# Altium PCB JUNORPCFront.PcbDoc (part 2 of 2)
Units mm, origin at the board's own origin, x right, y up, seen from the top; angles counter-clockwise.
Board outline 105.76 x 80.76 mm, 8 copper layers (Top Layer, Internal Plane 1, Signal Layer 1, Internal Plane 2, Signal Layer 2, Internal Plane 3, Internal Plane 4, Bottom Layer), stack 1.684 mm thick; 360 components, 183 nets, 1164 pads, 385 vias.
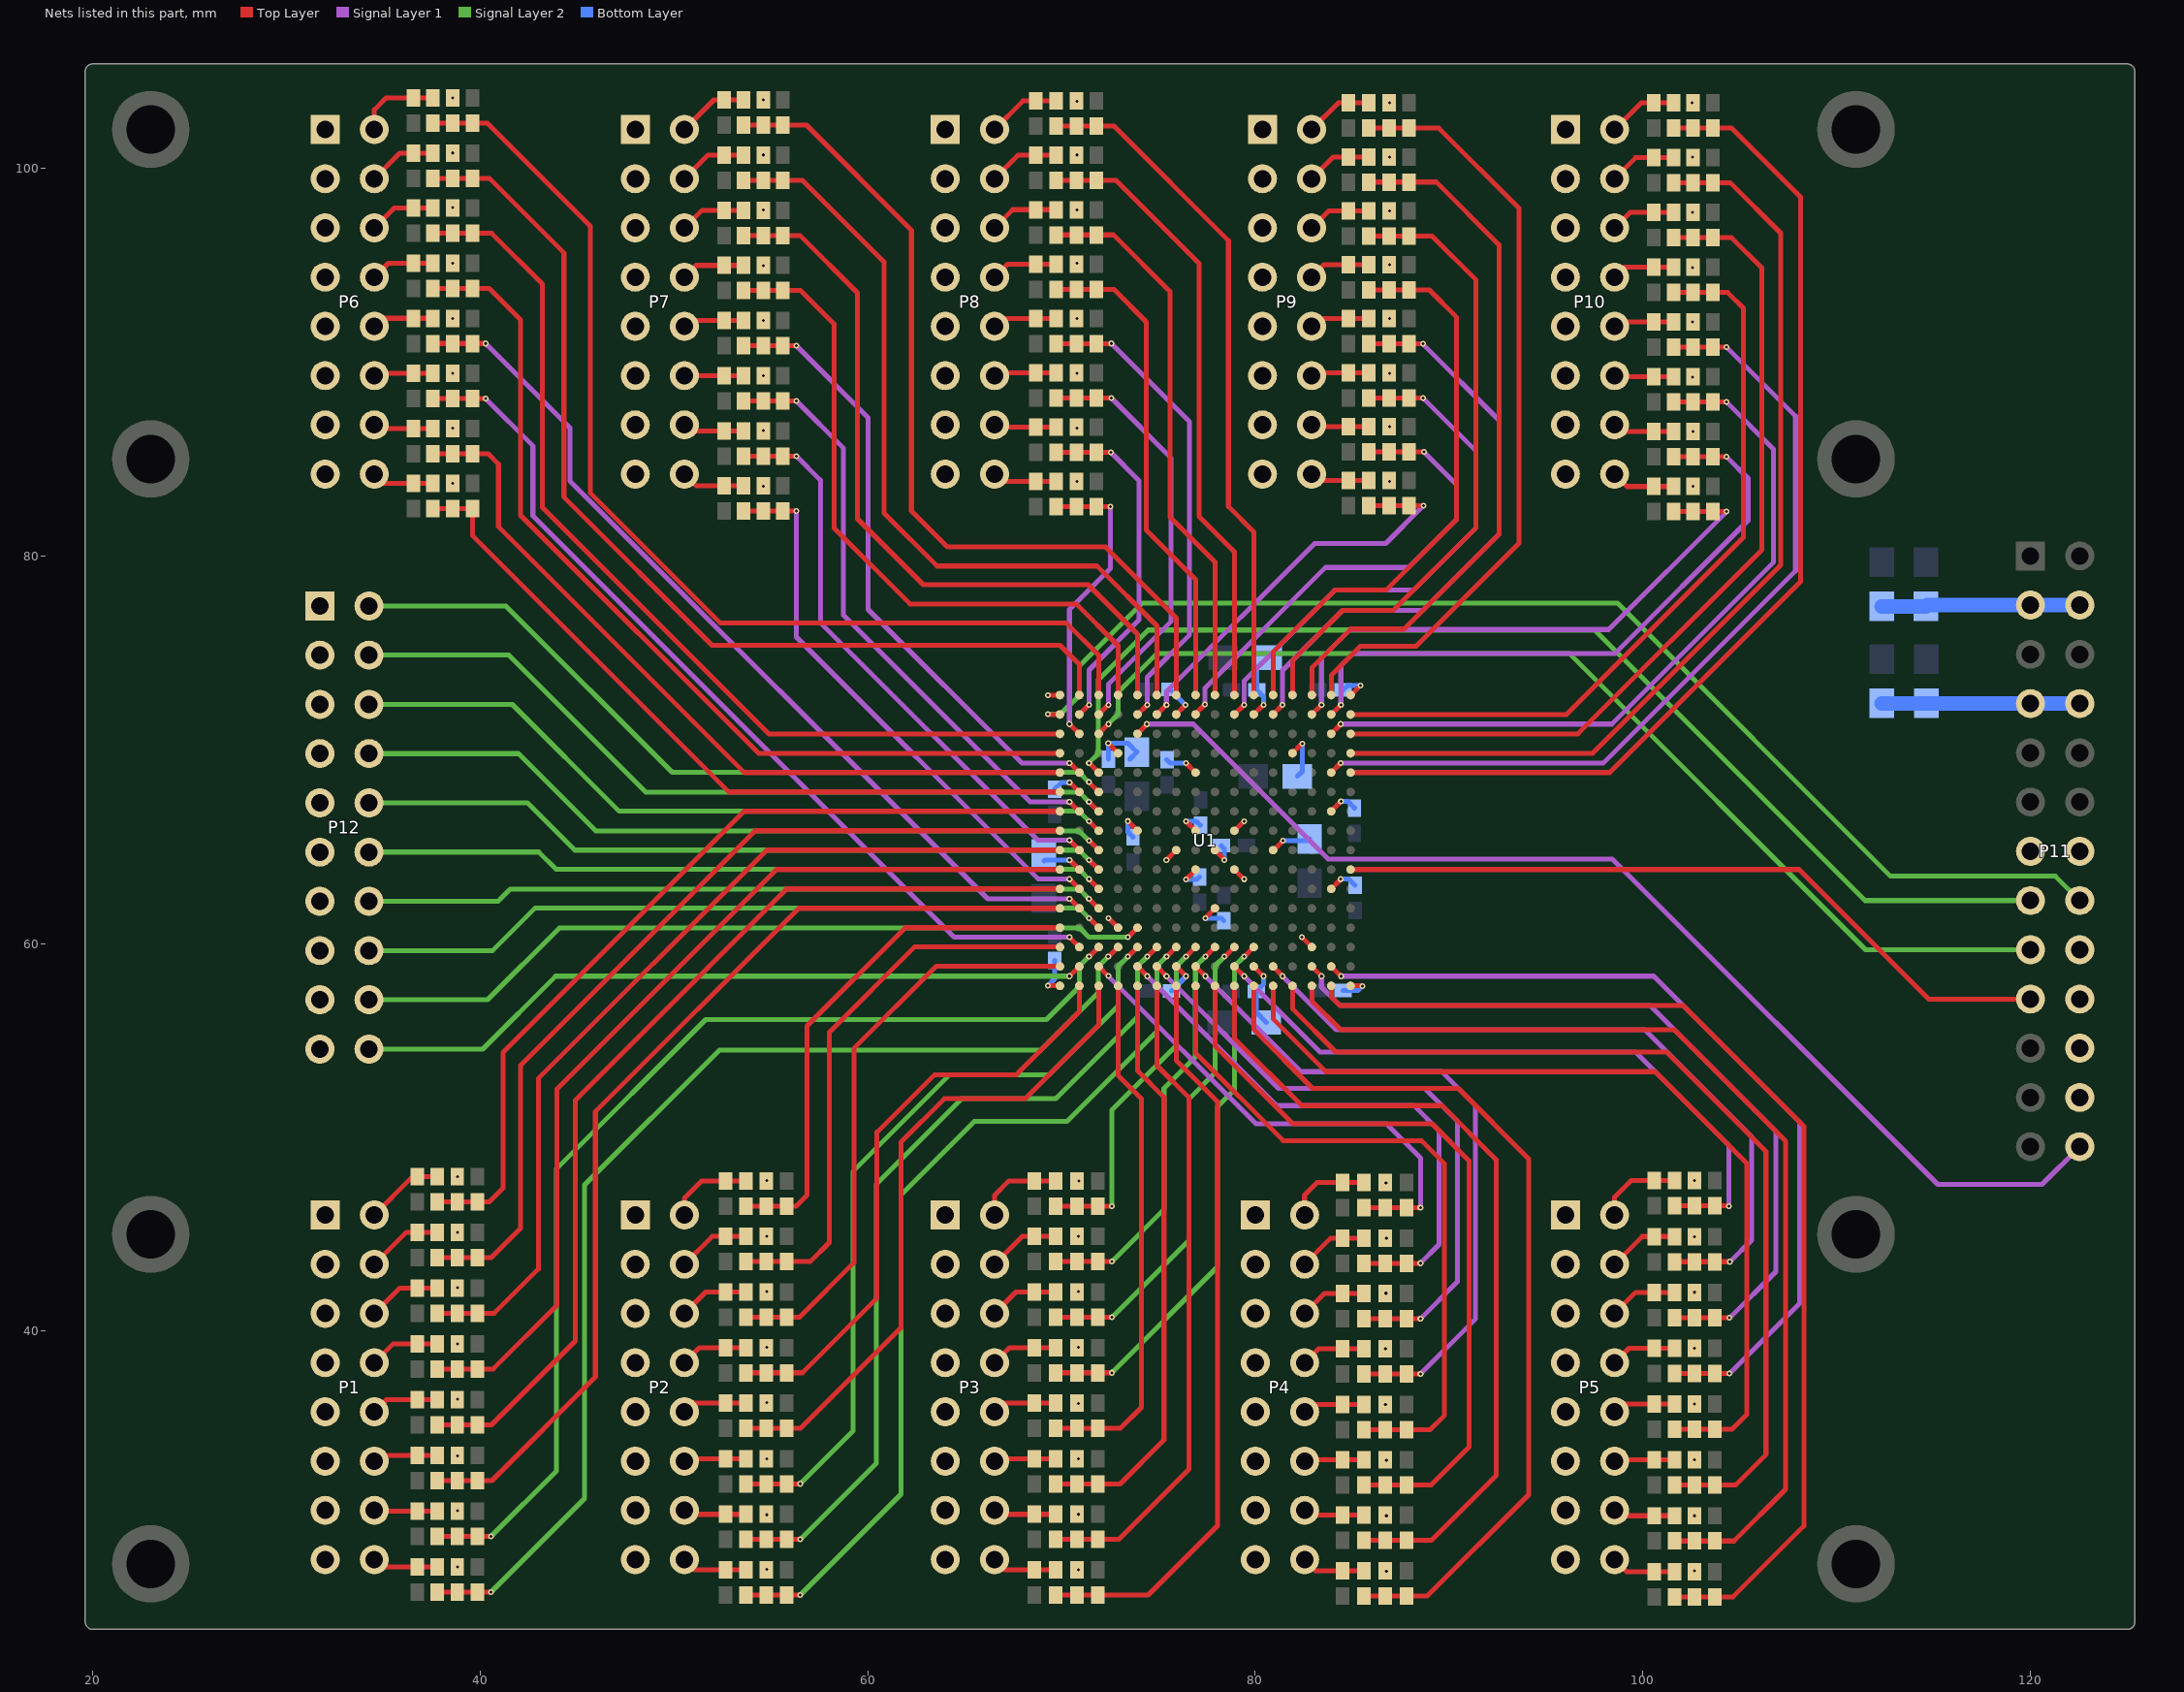
[diagram p8: the nets of this part, all layers, seen from the top]

## Via types
v1: diameter 0.305, hole 0.152, Top Layer to Bottom Layer, 385 vias

## Nets (pads, with @x,y where several pads share a name; then routed paths per layer and width w, separated by ;. In a path a pad name is that pad's centre, name@x,y a point inside that pad or via, vN(x,y) a via of type N, cw(c..) or ccw(c..) an arc to the next point about the centre after c; other vN are vias at no path point) (continued)
GND: C81.1 C82.1 C83.1 C84.1 C85.1 C86.1 C87.1 C88.1 C89.1 C90.1 C91.1 C92.1 C93.1 C94.1 C95.1 C96.1 C97.1 C98.1 C99.1 C100.1 C101.1 C102.1 C103.1 C104.1 C105.1 C112.1 C113.1 P1.1 P1.3 P1.5 P1.7 P1.9 P1.11 P1.13 P1.15 P2.1 P2.3 P2.5 P2.7 P2.9 P2.11 P2.13 P2.15 P3.1 P3.3 P3.5 P3.7 P3.9 P3.11 P3.13 P3.15 P4.1 P4.3 P4.5 P4.7 P4.9 P4.11 P4.13 P4.15 P5.1 P5.3 P5.5 P5.7 P5.9 P5.11 P5.13 P5.15 P6.1 P6.3 P6.5 P6.7 P6.9 P6.11 P6.13 P6.15 P7.1 P7.3 P7.5 P7.7 P7.9 P7.11 P7.13 P7.15 P8.1 P8.3 P8.5 P8.7 P8.9 P8.11 P8.13 P8.15 P9.1 P9.3 P9.5 P9.7 P9.9 P9.11 P9.13 P9.15 P10.1 P10.3 P10.5 P10.7 P10.9 P10.11 P10.13 P10.15 P11.3 P11.4 P11.7 P11.8 P11.13 P11.14 P11.18 P11.20 P11.22 P11.24 P12.1 P12.3 P12.5 P12.7 P12.9 P12.11 P12.13 P12.15 P12.17 P12.19 R4.1 R6.1 R10.1 R12.1 R16.1 R18.1 R22.1 R24.1 R28.1 R30.1 R34.1 R36.1 R40.1 R42.1 R46.1 R48.1 R52.1 R54.1 R58.1 R60.1 R64.1 R66.1 R70.1 R72.1 R76.1 R78.1 R82.1 R84.1 R88.1 R90.1 R94.1 R96.1 R100.1 R102.1 R106.1 R108.1 R112.1 R114.1 R118.1 R120.1 R124.1 R126.1 R130.1 R132.1 R136.1 R138.1 R142.1 R144.1 R148.1 R150.1 R154.1 R156.1 R160.1 R162.1 R166.1 R168.1 R172.1 R174.1 R178.1 R180.1 R184.1 R186.1 R190.1 R192.1 R196.1 R198.1 R202.1 R204.1 R208.1 R210.1 R214.1 R216.1 R220.1 R222.1 R226.1 R228.1 R232.1 R234.1 R238.1 R240.1 U1.A1 U1.A16 U1.B7 U1.B11 U1.D4 U1.D13 U1.E9 U1.G2 U1.G8 U1.G15 U1.H7 U1.H9 U1.H12 U1.J5 U1.J8 U1.K7 U1.K9 U1.L2 U1.L15 U1.M8 U1.N13 U1.P3 U1.R6 U1.R10 U1.T1 U1.T16 | length 65.5
  Top Layer w0.254: v1(69.291,57.821) U1.A1@69.918,57.821 ; v1(69.291,72.822) v1(69.291,72.822) U1.A16@69.918,72.821 ; v1(70.409,64.313) 70.426,64.313 U1.B7@70.918,63.821 ; v1(70.409,68.301) 70.438,68.301 U1.B11@70.918,67.821 ; v1(72.411,70.333) 72.918,69.826 U1.D13@72.918,69.821 ; v1(72.415,61.316) 72.423,61.316 U1.D4@72.918,60.821 ; v1(73.42,66.319) U1.E9@73.918,65.821 ; v1(75.411,64.313) U1.G8@75.918,64.821 ; U1.G2@75.918,58.821 75.926,58.821 v1(76.429,58.318) ; U1.G15@75.918,71.821 76.403,72.306 v1(76.403,72.314) ; v1(76.429,63.307) 76.918,63.796 U1.H7@76.918,63.821 ; v1(76.429,66.313) 76.918,65.824 U1.H9@76.918,65.821 ; v1(76.429,69.307) 76.915,68.821 U1.H12@76.918,68.821 ; v1(77.419,61.316) 77.918,61.814 U1.J5@77.918,61.821 ; U1.J8@77.918,64.821 78.41,64.329 v1(78.41,64.314) ; U1.K7@78.918,63.821 79.416,63.322 v1(79.42,63.322) ; U1.K9@78.918,65.821 78.928,65.821 v1(79.426,66.318) ; U1.L2@79.918,58.821 80.416,58.322 v1(80.416,58.318) ; U1.L15@79.918,71.821 80.411,72.314 v1(80.416,72.314) ; U1.M8@80.918,64.821 80.95,64.821 v1(81.432,65.303) ; U1.N13@81.918,69.821 82.404,70.307 v1(82.423,70.307) ; v1(82.398,60.325) 82.414,60.325 U1.P3@82.918,59.821 ; U1.R6@83.918,62.821 84.404,63.307 v1(84.404,63.322) ; U1.R10@83.918,66.821 83.918,66.837 v1(84.416,67.335) ; U1.T1@84.918,57.821 85.511,57.821 v1(85.522,57.81) ; U1.T16@84.918,72.821 84.937,72.821 v1(85.42,73.304)
  Bottom Layer w0.254: C97.1@69.088,64.262 69.139,64.313 v1(70.409,64.313) ; v1(69.291,57.821) 69.647,58.176 C98.1@69.647,59.127 ; C99.1@69.647,67.96 69.987,68.301 v1(70.409,68.301) ; C95.1@72.423,69.517 C95.1@72.415,69.509 72.415,70.328 v1(72.411,70.333) 73.431,70.333 C81.1@73.889,69.875 C81.1@73.523,69.509 ; v1(73.42,66.319) 73.42,65.761 C84.1@73.685,65.496 ; C82.1@75.438,69.484 75.615,69.307 v1(76.429,69.307) ; C101.1@75.605,73.101 76.393,72.314 v1(76.403,72.314) ; C89.1@75.682,57.556 76.429,58.303 v1(76.429,58.318) ; v1(76.429,63.307) 76.983,63.307 C83.1@77.114,63.439 ; v1(76.429,66.313) 76.954,66.313 C93.1@77.165,66.101 ; v1(77.419,61.316) 78.242,61.316 C96.1@78.384,61.174 ; C94.1@78.242,65.049 78.41,64.882 v1(78.41,64.314) ; v1(80.416,58.318) 80.416,57.897 C90.1@80.05,57.531 80.05,56.449 C88.1@80.569,55.931 ; v1(80.416,72.314) 80.416,72.741 C102.1@80.081,73.076 80.081,74.214 C100.1@80.62,74.752 ; v1(81.432,65.303) 82.702,65.303 C85.1@82.804,65.405 ; C92.1@82.169,68.631 82.423,68.885 v1(82.423,70.307) ; v1(84.404,63.322) 84.826,63.322 C87.1@85.141,63.007 ; v1(84.416,67.335) 84.775,67.335 C86.1@85.115,66.995 ; C91.1@84.521,57.582 85.293,57.582 v1(85.522,57.81) ; C103.1@84.521,73.076 84.749,73.304 v1(85.42,73.304)
  Bottom Layer w0.762: C112.1@112.319,72.39 C113.1@114.63,72.39 114.64,72.38 P11.7@120,72.38 P11.8@122.54,72.38 ; C104.1@112.319,77.394 C105.1@114.605,77.394 114.671,77.46 P11.3@120,77.46 P11.4@122.54,77.46
  other v1: 86.766,27.61 102.667,27.635 70.866,27.686 54.788,27.711 38.837,27.838 86.766,30.48 102.667,30.48 54.788,30.531 70.866,30.556 38.837,30.734 86.766,33.35 102.667,33.376 54.788,33.426 70.866,33.426 38.837,33.579 86.716,36.22 102.667,36.246 70.866,36.271 54.788,36.322 38.837,36.5 86.716,39.091 102.667,39.116 54.788,39.167 70.866,39.167 38.837,39.345 86.741,41.961 102.667,42.012 54.788,42.037 70.866,42.037 38.837,42.24 86.766,44.806 102.667,44.882 54.788,44.907 70.866,44.907 38.837,45.11 86.741,47.65 70.891,47.752 54.788,47.777 102.667,47.777 38.837,47.981 54.61,83.591 102.591,83.591 38.583,83.744 70.79,83.845 86.919,83.845 102.591,86.411 54.61,86.462 38.583,86.589 70.79,86.589 86.919,86.665 102.565,89.23 54.61,89.3 38.583,89.408 70.79,89.408 86.919,89.408 102.565,92.075 54.61,92.151 38.583,92.253 70.79,92.253 86.919,92.253 102.565,94.869 54.61,94.971 86.919,95.021 38.583,95.098 70.79,95.098 102.565,97.714 86.919,97.79 54.61,97.841 70.79,97.841 38.583,97.968 86.919,100.584 102.565,100.584 54.61,100.686 70.79,100.686 38.583,100.787 86.919,103.378 102.54,103.378 70.79,103.454 54.61,103.53 38.583,103.632
P1S1_ECL: C1.1 P1.2 R3.2 | length 4.1
  Top Layer w0.254: P1.2@34.54,46 36.525,47.985 R3.2@36.754,47.985 C1.1@37.787,47.985
P1S1_LVCMOS12: C1.2 R1.1 R4.2 U1.A10 | length 44.6
  Top Layer w0.254: C1.2@37.787,46.685 R4.2@38.82,46.685 R1.1@39.853,46.685 40.488,46.685 41.173,47.371 41.173,54.381 53.613,66.821 U1.A10@69.918,66.821
P1S2_ECL: C3.1 P1.4 R9.2 | length 3.9
  Top Layer w0.254: P1.4@34.54,43.46 36.188,45.108 R9.2@36.754,45.108 C3.1@37.787,45.108
P1S2_LVCMOS12: C3.2 R7.1 R10.2 U1.A9 | length 46.2
  Top Layer w0.254: C3.2@37.787,43.808 R10.2@38.82,43.808 R7.1@39.853,43.808 40.582,43.808 42.088,45.314 42.088,53.721 54.188,65.821 U1.A9@69.918,65.821
P1S3_ECL: C5.1 P1.6 R15.2 | length 3.8
  Top Layer w0.254: P1.6@34.54,40.92 35.85,42.23 R15.2@36.754,42.23 C5.1@37.787,42.23
P1S3_LVCMOS12: C5.2 R13.1 R16.2 U1.A8 | length 47.8
  Top Layer w0.254: C5.2@37.787,40.93 R16.2@38.82,40.93 R13.1@39.853,40.93 40.727,40.93 43.002,43.205 43.002,53.035 54.788,64.821 U1.A8@69.918,64.821
P1S4_ECL: C7.1 P1.8 R21.2 | length 3.6
  Top Layer w0.254: P1.8@34.54,38.38 35.513,39.353 R21.2@36.754,39.353 C7.1@37.787,39.353
P1S4_LVCMOS12: C7.2 R19.1 R22.2 U1.A7 | length 49.3
  Top Layer w0.254: C7.2@37.787,38.053 R22.2@38.82,38.053 R19.1@39.853,38.053 40.669,38.053 43.967,41.351 43.967,52.502 55.286,63.821 U1.A7@69.918,63.821
P1S5_ECL: C9.1 P1.10 R27.2 | length 3.5
  Top Layer w0.254: P1.10@34.54,35.84 35.175,36.475 R27.2@36.754,36.475 C9.1@37.787,36.475
P1S5_LVCMOS12: C9.2 R25.1 R28.2 U1.A6 | length 50.9
  Top Layer w0.254: C9.2@37.787,35.175 R28.2@38.82,35.175 R25.1@39.853,35.175 40.586,35.175 44.907,39.497 44.907,51.918 55.81,62.821 U1.A6@69.918,62.821
P1S6_ECL: C11.1 P1.12 R33.2 | length 3.4
  Top Layer w0.254: P1.12@34.54,33.3 34.838,33.598 R33.2@36.754,33.598 C11.1@37.787,33.598 C11.1@37.767,33.618
P1S6_LVCMOS12: C11.2 R31.1 R34.2 U1.A5 | length 52.4
  Top Layer w0.254: C11.2@37.787,32.298 R34.2@38.82,32.298 R31.1@39.853,32.298 40.604,32.298 45.949,37.643 45.949,51.333 56.436,61.821 U1.A5@69.918,61.821
P1S7_ECL: C13.1 P1.14 R39.2 | length 3.3
  Top Layer w0.254: P1.14@34.54,30.76 34.58,30.72 R39.2@36.754,30.72 C13.1@37.787,30.72
P1S7_LVCMOS12: C13.2 R37.1 R40.2 U1.C3 | length 56.5
  Top Layer w0.254: C13.2@37.787,29.42 R40.2@38.82,29.42 R37.1@39.853,29.42 v1(40.564,29.42) ; v1(71.411,59.334) 71.431,59.334 U1.C3@71.918,59.821
  Signal Layer 2 w0.254: v1(40.564,29.42) 43.942,32.799 43.942,48.387 51.638,56.083 69.215,56.083 70.917,57.785 70.917,58.84 v1(71.411,59.334)
P1S8_ECL: C15.1 P1.16 R45.2 | length 3.4
  Top Layer w0.254: P1.16@34.54,28.22 34.917,27.843 R45.2@36.754,27.843 C15.1@37.787,27.843
P1S8_LVCMOS12: C15.2 R43.1 R46.2 U1.D3 | length 59.2
  Top Layer w0.254: C15.2@37.787,26.543 R46.2@38.82,26.543 R43.1@39.853,26.543 v1(40.564,26.543) ; v1(72.411,59.334) 72.431,59.334 U1.D3@72.918,59.821
  Signal Layer 2 w0.254: v1(40.564,26.543) 45.39,31.369 45.39,47.549 52.349,54.508 68.936,54.508 71.907,57.48 71.907,58.831 v1(72.411,59.334)
P2S1_ECL: C2.1 P2.2 R5.2 | length 4.4
  Top Layer w0.254: P2.2@50.54,46 50.54,46.857 51.44,47.757 R5.2@52.654,47.757 C2.1@53.704,47.757
P2S1_LVCMOS12: C2.2 R2.1 R6.2 U1.A4 | length 27.3
  Top Layer w0.254: C2.2@53.704,46.457 R6.2@54.754,46.457 R2.1@55.804,46.457 56.312,46.457 56.871,47.015 56.871,55.753 61.938,60.821 U1.A4@69.918,60.821
P2S2_ECL: C4.1 P2.4 R11.2 | length 3.8
  Top Layer w0.254: P2.4@50.54,43.46 51.97,44.89 R11.2@52.654,44.89 C4.1@53.704,44.89
P2S2_LVCMOS12: C4.2 R8.1 R12.2 U1.A3 | length 29.3
  Top Layer w0.254: C4.2@53.704,43.59 R12.2@54.754,43.59 R8.1@55.804,43.59 57.027,43.59 58.014,44.577 58.014,55.423 62.412,59.821 U1.A3@69.918,59.821
P2S3_ECL: C6.1 P2.6 R17.2 | length 3.6
  Top Layer w0.254: P2.6@50.54,40.92 51.643,42.023 R17.2@52.654,42.023 C6.1@53.704,42.023
P2S3_LVCMOS12: C6.2 R14.1 R18.2 U1.A2 | length 30.2
  Top Layer w0.254: C6.2@53.704,40.723 R18.2@54.754,40.723 R14.1@55.804,40.723 56.471,40.723 59.284,43.536 59.284,54.585 63.52,58.821 U1.A2@69.918,58.821
P2S4_ECL: C8.1 P2.8 R23.2 | length 3.5
  Top Layer w0.254: P2.8@50.54,38.38 51.317,39.157 R23.2@52.654,39.157 C8.1@53.704,39.157
P2S4_LVCMOS12: C8.2 R20.1 R24.2 U1.B1 | length 31.3
  Top Layer w0.254: C8.2@53.704,37.857 R24.2@54.754,37.857 R20.1@55.804,37.857 56.627,37.857 60.477,41.707 60.477,50.267 63.449,53.238 67.666,53.238 70.918,56.491 U1.B1@70.918,57.821
P2S5_ECL: C10.1 P2.10 R29.2 | length 3.4
  Top Layer w0.254: P2.10@50.54,35.84 50.99,36.29 R29.2@52.654,36.29 C10.1@53.704,36.29
P2S5_LVCMOS12: C10.2 R26.1 R30.2 U1.C1 | length 34.5
  Top Layer w0.254: C10.2@53.704,34.99 R30.2@54.754,34.99 R26.1@55.804,34.99 56.53,34.99 61.722,40.183 61.722,49.759 63.957,51.994 68.123,51.994 71.918,55.789 U1.C1@71.918,57.821
P2S6_ECL: C12.1 P2.12 R35.2 | length 3.2
  Top Layer w0.254: P2.12@50.54,33.3 50.664,33.424 R35.2@52.654,33.424 C12.1@53.704,33.424
P2S6_LVCMOS12: C12.2 R32.1 R36.2 U1.E3 | length 40.7
  Top Layer w0.254: C12.2@53.704,32.124 R36.2@54.754,32.124 R32.1@55.804,32.124 56.508,32.124 v1(56.515,32.131) ; v1(73.431,59.334) U1.E3@73.918,59.821
  Signal Layer 2 w0.254: v1(56.515,32.131) 59.233,34.849 59.233,48.235 64.237,53.238 69.367,53.238 72.923,56.794 72.923,58.826 v1(73.431,59.334)
P2S7_ECL: C14.1 P2.14 R41.2 | length 3.2
  Top Layer w0.254: P2.14@50.54,30.76 50.743,30.557 R41.2@52.654,30.557 C14.1@53.704,30.557
P2S7_LVCMOS12: C14.2 R38.1 R42.2 U1.F3 | length 43.8
  Top Layer w0.254: C14.2@53.704,29.257 R42.2@54.754,29.257 R38.1@55.804,29.257 56.511,29.257 v1(56.515,29.261) ; v1(74.422,59.334) 74.431,59.334 U1.F3@74.918,59.821
  Signal Layer 2 w0.254: v1(56.515,29.261) 60.452,33.198 60.452,47.6 64.846,51.994 69.698,51.994 73.914,56.21 73.914,58.826 v1(74.422,59.334)
P2S8_ECL: C16.1 P2.16 R47.2 | length 3.4
  Top Layer w0.254: P2.16@50.54,28.22 51.069,27.691 R47.2@52.654,27.691 C16.1@53.704,27.691
P2S8_LVCMOS12: C16.2 R44.1 R48.2 U1.G3 | length 47.1
  Top Layer w0.254: C16.2@53.704,26.391 R48.2@54.754,26.391 R44.1@55.804,26.391 v1(56.515,26.391) ; v1(75.413,59.334) 75.431,59.334 U1.G3@75.918,59.821
  Signal Layer 2 w0.254: v1(56.515,26.391) 61.722,31.598 61.722,47.041 65.507,50.825 70.282,50.825 74.93,55.474 74.93,58.852 v1(75.413,59.334)
P3S1_ECL: C17.1 P3.2 R51.2 | length 4.5
  Top Layer w0.254: P3.2@66.54,46 66.54,47.012 67.285,47.757 R51.2@68.605,47.757 C17.1@69.698,47.757
P3S1_LVCMOS12: C17.2 R49.1 R52.2 U1.H3 | length 18.1
  Top Layer w0.254: C17.2@69.698,46.457 R52.2@70.79,46.457 R49.1@71.882,46.457 v1(72.593,46.457) ; v1(76.429,59.334) 76.431,59.334 U1.H3@76.918,59.821
  Signal Layer 2 w0.254: v1(72.593,46.457) 72.593,51.41 75.921,54.737 75.921,58.826 v1(76.429,59.334)
P3S2_ECL: C19.1 P3.4 R57.2 | length 3.7
  Top Layer w0.254: P3.4@66.54,43.46 67.97,44.89 R57.2@68.605,44.89 C19.1@69.698,44.89
P3S2_LVCMOS12: C19.2 R55.1 R58.2 U1.J3 | length 21.3
  Top Layer w0.254: C19.2@69.698,43.59 R58.2@70.79,43.59 R55.1@71.882,43.59 v1(72.593,43.59) ; v1(77.419,59.334) 77.431,59.334 U1.J3@77.918,59.821
  Signal Layer 2 w0.254: v1(72.593,43.59) 75.286,46.282 75.286,52.527 76.911,54.153 76.911,58.826 v1(77.419,59.334)
P3S3_ECL: C21.1 P3.6 R63.2 | length 3.6
  Top Layer w0.254: P3.6@66.54,40.92 67.643,42.023 R63.2@68.605,42.023 C21.1@69.698,42.023
P3S3_LVCMOS12: C21.2 R61.1 R64.2 U1.K3 | length 24.6
  Top Layer w0.254: C21.2@69.698,40.723 R64.2@70.79,40.723 R61.1@71.882,40.723 72.586,40.723 v1(72.593,40.716) ; v1(78.41,59.334) 78.431,59.334 U1.K3@78.918,59.821
  Signal Layer 2 w0.254: v1(72.593,40.716) 76.581,44.704 76.581,51.994 77.927,53.34 77.927,58.852 v1(78.41,59.334)
P3S4_ECL: C23.1 P3.8 R69.2 | length 3.5
  Top Layer w0.254: P3.8@66.54,38.38 67.317,39.157 R69.2@68.605,39.157 C23.1@69.698,39.157
P3S4_LVCMOS12: C23.2 R67.1 R70.2 U1.L3 | length 27.9
  Top Layer w0.254: C23.2@69.698,37.857 R70.2@70.79,37.857 R67.1@71.882,37.857 v1(72.593,37.857) ; v1(79.426,59.334) 79.431,59.334 U1.L3@79.918,59.821
  Signal Layer 2 w0.254: v1(72.593,37.857) 78.054,43.318 78.054,51.587 78.918,52.451 78.918,58.826 v1(79.426,59.334)
P3S5_ECL: C25.1 P3.10 R75.2 | length 3.3
  Top Layer w0.254: P3.10@66.54,35.84 66.99,36.29 R75.2@68.605,36.29 C25.1@69.698,36.29
P3S5_LVCMOS12: C25.2 R73.1 R76.2 U1.D1 | length 27.1
  Top Layer w0.254: C25.2@69.698,34.99 R76.2@70.79,34.99 R73.1@71.882,34.99 73.04,34.99 74.117,36.068 74.117,51.994 72.918,53.193 U1.D1@72.918,57.821
P3S6_ECL: C27.1 P3.12 R81.2 | length 3.2
  Top Layer w0.254: P3.12@66.54,33.3 66.664,33.424 R81.2@68.605,33.424 C27.1@69.698,33.424
P3S6_LVCMOS12: C27.2 R79.1 R82.2 U1.E1 | length 30.5
  Top Layer w0.254: C27.2@69.698,32.124 R82.2@70.79,32.124 R79.1@71.882,32.124 73.018,32.124 75.286,34.392 75.286,52.07 73.918,53.438 U1.E1@73.918,57.821
P3S7_ECL: C29.1 P3.14 R87.2 | length 3.2
  Top Layer w0.254: P3.14@66.54,30.76 66.743,30.557 R87.2@68.605,30.557 C29.1@69.698,30.557
P3S7_LVCMOS12: C29.2 R85.1 R88.2 U1.F1 | length 34
  Top Layer w0.254: C29.2@69.698,29.257 R88.2@70.79,29.257 R85.1@71.882,29.257 72.945,29.257 76.581,32.893 76.581,52.045 74.918,53.708 U1.F1@74.918,57.821
P3S8_ECL: C31.1 P3.16 R93.2 | length 3.4
  Top Layer w0.254: P3.16@66.54,28.22 67.069,27.691 R93.2@68.605,27.691 C31.1@69.698,27.691
P3S8_LVCMOS12: C31.2 R91.1 R94.2 U1.G1 | length 38.6
  Top Layer w0.254: C31.2@69.698,26.391 R94.2@70.79,26.391 R91.1@71.882,26.391 74.473,26.391 78.054,29.972 78.054,51.841 75.918,53.978 U1.G1@75.918,57.821
P4S1_ECL: C18.1 P4.2 R53.2 | length 4.4
  Top Layer w0.254: P4.2@82.54,46 82.54,47.031 83.175,47.665 R53.2@84.506,47.665 C18.1@85.606,47.665
P4S1_LVCMOS12: C18.2 R50.1 R54.2 U1.C2 | length 26.2
  Top Layer w0.254: U1.C2@71.918,58.82 v1(72.415,58.322) ; C18.2@85.606,46.365 R54.2@86.707,46.365 R50.1@87.808,46.365 88.504,46.365 v1(88.519,46.38)
  Signal Layer 1 w0.254: v1(72.415,58.322) 80.039,50.698 86.766,50.698 88.519,48.946 v1(88.519,46.38)
P4S2_ECL: C20.1 P4.4 R59.2 | length 3.6
  Top Layer w0.254: P4.4@82.54,43.46 83.886,44.806 R59.2@84.506,44.806 C20.1@85.606,44.806
P4S2_LVCMOS12: C20.2 R56.1 R60.2 U1.E2 | length 29.2
  Top Layer w0.254: U1.E2@73.918,58.821 73.92,58.821 v1(74.422,58.318) ; C20.2@85.606,43.506 R60.2@86.707,43.506 R56.1@87.808,43.506 88.515,43.506 v1(88.519,43.51)
  Signal Layer 1 w0.254: v1(74.422,58.318) 81.102,51.638 88.189,51.638 89.484,50.343 89.484,44.475 v1(88.519,43.51)
P4S3_ECL: C22.1 P4.6 R65.2 | length 3.5
  Top Layer w0.254: P4.6@82.54,40.92 83.567,41.947 R65.2@84.506,41.947 C22.1@85.606,41.947
P4S3_LVCMOS12: C22.2 R62.1 R66.2 U1.F2 | length 32.7
  Top Layer w0.254: U1.F2@74.918,58.821 74.918,58.813 v1(75.413,58.318) ; C22.2@85.606,40.647 R66.2@86.707,40.647 R62.1@87.808,40.647 88.512,40.647 v1(88.519,40.64)
  Signal Layer 1 w0.254: v1(75.413,58.318) 81.204,52.527 88.748,52.527 90.424,50.851 90.424,42.545 v1(88.519,40.64)
P4S4_ECL: C24.1 P4.8 R71.2 | length 3.4
  Top Layer w0.254: P4.8@82.54,38.38 83.247,39.087 R71.2@84.506,39.087 C24.1@85.606,39.087
P4S4_LVCMOS12: C24.2 R68.1 R72.2 U1.H2 | length 35.4
  Top Layer w0.254: U1.H2@76.918,58.82 v1(77.419,58.318) ; C24.2@85.606,37.787 R72.2@86.707,37.787 R68.1@87.808,37.787 88.511,37.787 v1(88.519,37.795)
  Signal Layer 1 w0.254: v1(77.419,58.318) 82.347,53.391 89.611,53.391 91.364,51.638 91.364,40.64 v1(88.519,37.795)
P4S5_ECL: C26.1 P4.10 R77.2 | length 3.2
  Top Layer w0.254: P4.10@82.54,35.84 82.928,36.228 R77.2@84.506,36.228 C26.1@85.606,36.228
P4S5_LVCMOS12: C26.2 R74.1 R78.2 U1.H1 | length 36.1
  Top Layer w0.254: U1.H1@76.918,57.821 76.918,54.349 81.432,49.835 88.57,49.835 89.764,48.641 89.764,35.662 89.03,34.928 R74.1@87.808,34.928 R78.2@86.707,34.928 C26.2@85.606,34.928
P4S6_ECL: C28.1 P4.12 R83.2 | length 3.1
  Top Layer w0.254: P4.12@82.54,33.3 82.609,33.369 R83.2@84.506,33.369 C28.1@85.606,33.369
P4S6_LVCMOS12: C28.2 R80.1 R84.2 U1.J1 | length 39.7
  Top Layer w0.254: U1.J1@77.918,57.821 77.918,54.721 81.94,50.698 89.129,50.698 91.034,48.793 91.034,34.036 89.066,32.069 R80.1@87.808,32.069 R84.2@86.707,32.069 C28.2@85.606,32.069
P4S7_ECL: C30.1 P4.14 R89.2 | length 3.2
  Top Layer w0.254: P4.14@82.54,30.76 82.79,30.51 R89.2@84.506,30.51 C30.1@85.606,30.51
P4S7_LVCMOS12: C30.2 R86.1 R90.2 U1.K1 | length 43.3
  Top Layer w0.254: U1.K1@78.918,57.821 78.918,55.118 82.398,51.638 89.637,51.638 92.431,48.844 92.431,32.563 89.077,29.21 R86.1@87.808,29.21 R90.2@86.707,29.21 C30.2@85.606,29.21
P4S8_ECL: C32.1 P4.16 R95.2 | length 3.3
  Top Layer w0.254: P4.16@82.54,28.22 83.11,27.65 R95.2@84.506,27.65 C32.1@85.606,27.65
P4S8_LVCMOS12: C32.2 R92.1 R96.2 U1.L1 | length 47.2
  Top Layer w0.254: U1.L1@79.918,57.821 79.918,55.566 82.956,52.527 90.475,52.527 94.107,48.895 94.107,31.572 88.885,26.35 R92.1@87.808,26.35 R96.2@86.707,26.35 C32.2@85.606,26.35
P5S1_ECL: C33.1 P5.2 R99.2 | length 4.4
  Top Layer w0.254: P5.2@98.54,46 98.54,46.927 99.38,47.767 C33.1@101.625,47.767
P5S1_LVCMOS12: C33.2 R97.1 R100.2 U1.K2 | length 35.3
  Top Layer w0.254: U1.K2@78.918,58.821 79.42,58.318 v1(79.426,58.318) ; C33.2@101.625,46.467 R100.2@102.667,46.467 R97.1@103.708,46.467 104.434,46.467 v1(104.445,46.457)
  Signal Layer 1 w0.254: v1(79.426,58.318) 83.337,54.407 99.619,54.407 104.445,49.581 v1(104.445,46.457)
P5S2_ECL: C35.1 P5.4 R105.2 | length 3.7
  Top Layer w0.254: P5.4@98.54,43.46 99.966,44.886 R105.2@100.584,44.886 C35.1@101.625,44.886
P5S2_LVCMOS12: C35.2 R103.1 R106.2 U1.M2 | length 38.1
  Top Layer w0.254: U1.M2@80.918,58.821 81.407,58.332 v1(81.407,58.318) ; C35.2@101.625,43.586 R106.2@102.667,43.586 R103.1@103.708,43.586 v1(104.496,43.586)
  Signal Layer 1 w0.254: v1(81.407,58.318) 84.176,55.55 100.101,55.55 105.613,50.038 105.613,44.704 v1(104.496,43.586)
P5S3_ECL: C37.1 P5.6 R111.2 | length 3.5
  Top Layer w0.254: P5.6@98.54,40.92 99.625,42.005 R111.2@100.584,42.005 C37.1@101.625,42.005
P5S3_LVCMOS12: C37.2 R109.1 R112.2 U1.P2 | length 41.3
  Top Layer w0.254: U1.P2@82.918,58.821 82.918,58.814 v1(83.414,58.318) ; C37.2@101.625,40.705 R112.2@102.667,40.705 R109.1@103.708,40.705 104.456,40.705 v1(104.47,40.691)
  Signal Layer 1 w0.254: v1(83.414,58.318) 83.414,57.76 84.379,56.794 100.381,56.794 106.858,50.317 106.858,43.078 v1(104.47,40.691)
P5S4_ECL: C39.1 P5.8 R117.2 | length 3.4
  Top Layer w0.254: P5.8@98.54,38.38 99.284,39.124 R117.2@100.584,39.124 C39.1@101.625,39.124
P5S4_LVCMOS12: C39.2 R115.1 R118.2 U1.R2 | length 44.8
  Top Layer w0.254: U1.R2@83.918,58.821 84.42,58.318 v1(84.43,58.318) ; C39.2@101.625,37.824 R118.2@102.667,37.824 R115.1@103.708,37.824 104.467,37.824 v1(104.47,37.821)
  Signal Layer 1 w0.254: v1(84.43,58.318) 100.559,58.318 108.102,50.775 108.102,41.453 v1(104.47,37.821)
P5S5_ECL: C41.1 P5.10 R123.2 | length 3.3
  Top Layer w0.254: P5.10@98.54,35.84 98.943,36.243 R123.2@100.584,36.243 C41.1@101.625,36.243
P5S5_LVCMOS12: C41.2 R121.1 R124.2 U1.M1 | length 46.2
  Top Layer w0.254: U1.M1@80.918,57.821 80.918,56.115 83.642,53.391 100.635,53.391 105.359,48.666 105.359,35.705 104.597,34.943 R121.1@103.708,34.943 R124.2@102.667,34.943 C41.2@101.625,34.943
P5S6_ECL: C43.1 P5.12 R129.2 | length 3.1
  Top Layer w0.254: P5.12@98.54,33.3 98.602,33.362 R129.2@100.584,33.362 C43.1@101.625,33.362
P5S6_LVCMOS12: C43.2 R127.1 R130.2 U1.N1 | length 49.7
  Top Layer w0.254: U1.N1@81.918,57.821 81.918,56.642 84.153,54.407 101.219,54.407 106.35,49.276 106.35,33.636 104.775,32.062 R127.1@103.708,32.062 R130.2@102.667,32.062 C43.2@101.625,32.062
P5S7_ECL: C45.1 P5.14 R135.2 | length 3.2
  Top Layer w0.254: P5.14@98.54,30.76 98.82,30.48 R135.2@100.584,30.48 C45.1@101.625,30.48
P5S7_LVCMOS12: C45.2 R133.1 R136.2 U1.P1 | length 53
  Top Layer w0.254: U1.P1@82.918,57.821 82.918,57.048 84.416,55.55 101.625,55.55 107.366,49.809 107.366,31.847 104.699,29.18 R133.1@103.708,29.18 R136.2@102.667,29.18 C45.2@101.625,29.18
P5S8_ECL: C47.1 P5.16 R141.2 | length 3.3
  Top Layer w0.254: P5.16@98.54,28.22 99.161,27.599 R141.2@100.584,27.599 C47.1@101.625,27.599
P5S8_LVCMOS12: C47.2 R139.1 R142.2 U1.R1 | length 56.5
  Top Layer w0.254: U1.R1@83.918,57.821 83.918,57.252 84.375,56.794 102.083,56.794 108.306,50.571 108.306,29.957 104.648,26.299 R139.1@103.708,26.299 R142.2@102.667,26.299 C47.2@101.625,26.299
P6S1_ECL: C34.1 P6.2 R101.2 | length 4.3
  Top Layer w0.254: P6.2@34.54,102 34.54,103.018 35.143,103.622 R101.2@36.551,103.622 C34.1@37.567,103.622
P6S1_LVCMOS12: C34.2 R98.1 R102.2 U1.C16 | length 55.8
  Top Layer w0.254: C34.2@37.567,102.322 R102.2@38.583,102.322 R98.1@39.599,102.322 40.376,102.322 45.695,97.003 45.695,83.234 52.398,76.53 70.256,76.53 71.918,74.869 U1.C16@71.918,72.821
P6S2_ECL: C36.1 P6.4 R107.2 | length 3.6
  Top Layer w0.254: P6.4@34.54,99.46 35.86,100.78 R107.2@36.551,100.78 C36.1@37.567,100.78
P6S2_LVCMOS12: C36.2 R104.1 R108.2 U1.B16 | length 52.7
  Top Layer w0.254: C36.2@37.567,99.48 R108.2@38.583,99.48 R104.1@39.599,99.48 40.474,99.48 44.323,95.631 44.323,83.033 51.968,75.387 69.926,75.387 70.918,74.396 U1.B16@70.918,72.821
P6S3_ECL: C38.1 P6.6 R113.2 | length 3.4
  Top Layer w0.254: P6.6@34.54,96.92 35.559,97.939 R113.2@36.551,97.939 C38.1@37.567,97.939
P6S3_LVCMOS12: C38.2 R110.1 R114.2 U1.A14 | length 49.8
  Top Layer w0.254: C38.2@37.567,96.639 R114.2@38.583,96.639 R110.1@39.599,96.639 40.597,96.639 43.205,94.031 43.205,82.499 54.884,70.821 U1.A14@69.918,70.821
P6S4_ECL: C40.1 P6.8 R119.2 | length 3.3
  Top Layer w0.254: P6.8@34.54,94.38 35.258,95.098 R119.2@36.551,95.098 C40.1@37.567,95.098
P6S4_LVCMOS12: C40.2 R116.1 R120.2 U1.A13 | length 48.2
  Top Layer w0.254: C40.2@37.567,93.798 R120.2@38.583,93.798 R116.1@39.599,93.798 40.466,93.798 42.088,92.177 42.088,82.093 54.36,69.821 U1.A13@69.918,69.821
P6S5_ECL: C42.1 P6.10 R125.2 | length 3.2
  Top Layer w0.254: P6.10@34.54,91.84 34.957,92.257 R125.2@36.551,92.257 C42.1@37.567,92.257
P6S5_LVCMOS12: C42.2 R122.1 R126.2 U1.B5 | length 47
  Top Layer w0.254: C42.2@37.567,90.957 R126.2@38.583,90.957 R122.1@39.599,90.957 v1(40.284,90.957) ; v1(70.409,62.306) 70.432,62.306 U1.B5@70.918,61.821
  Signal Layer 1 w0.254: v1(40.284,90.957) 44.628,86.614 44.628,83.871 66.192,62.306 v1(70.409,62.306)
P6S6_ECL: C44.1 P6.12 R131.2 | length 3.1
  Top Layer w0.254: P6.12@34.54,89.3 34.656,89.416 R131.2@36.551,89.416 C44.1@37.567,89.416
P6S6_LVCMOS12: C44.2 R128.1 R132.2 U1.B3 | length 47.2
  Top Layer w0.254: C44.2@37.567,88.116 R132.2@38.583,88.116 R128.1@39.599,88.116 40.281,88.116 v1(40.284,88.113) ; v1(70.409,60.325) 70.414,60.325 U1.B3@70.918,59.821
  Signal Layer 1 w0.254: v1(40.284,88.113) 42.723,85.674 42.723,82.067 64.465,60.325 v1(70.409,60.325)
P6S7_ECL: C46.1 P6.14 R137.2 | length 3.1
  Top Layer w0.254: P6.14@34.54,86.76 34.725,86.575 R137.2@36.551,86.575 C46.1@37.567,86.575
P6S7_LVCMOS12: C46.2 R134.1 R138.2 U1.A12 | length 41.1
  Top Layer w0.254: C46.2@37.567,85.275 R138.2@38.583,85.275 R134.1@39.599,85.275 40.405,85.275 40.945,84.734 40.945,81.509 53.633,68.821 U1.A12@69.918,68.821
P6S8_ECL: C48.1 P6.16 R143.2 | length 3.2
  Top Layer w0.254: P6.16@34.54,84.22 35.027,83.733 R143.2@36.551,83.733 C48.1@37.567,83.733
P6S8_LVCMOS12: C48.2 R140.1 R144.2 U1.A11 | length 39.2
  Top Layer w0.254: C48.2@37.567,82.433 R144.2@38.583,82.433 R140.1@39.599,82.433 39.599,81.051 52.829,67.821 U1.A11@69.918,67.821
P7S1_ECL: C49.1 P7.2 R147.2 | length 3.7
  Top Layer w0.254: P7.2@50.54,102 52.06,103.52 R147.2@52.578,103.52 C49.1@53.594,103.52
P7S1_LVCMOS12: C49.2 R145.1 R148.2 U1.G16 | length 45.3
  Top Layer w0.254: C49.2@53.594,102.22 R148.2@54.61,102.22 R145.1@55.626,102.22 56.835,102.22 62.255,96.799 62.255,82.321 64.11,80.467 72.263,80.467 75.918,76.812 U1.G16@75.918,72.821
P7S2_ECL: C51.1 P7.4 R153.2 | length 3.6
  Top Layer w0.254: P7.4@50.54,99.46 51.755,100.675 R153.2@52.578,100.675 C51.1@53.594,100.675
P7S2_LVCMOS12: C51.2 R151.1 R154.2 U1.F16 | length 42
  Top Layer w0.254: C51.2@53.594,99.375 R154.2@54.61,99.375 R151.1@55.626,99.375 56.632,99.375 60.833,95.174 60.833,82.22 63.576,79.477 71.831,79.477 74.918,76.39 U1.F16@74.918,72.821
P7S3_ECL: C53.1 P7.6 R159.2 | length 3.4
  Top Layer w0.254: P7.6@50.54,96.92 51.45,97.83 R159.2@52.578,97.83 C53.1@53.594,97.83
P7S3_LVCMOS12: C53.2 R157.1 R160.2 U1.E16 | length 38.8
  Top Layer w0.254: C53.2@53.594,96.53 R160.2@54.61,96.53 R157.1@55.626,96.53 56.505,96.53 59.461,93.574 59.461,81.915 62.865,78.511 71.374,78.511 73.918,75.968 U1.E16@73.918,72.821
P7S4_ECL: C55.1 P7.8 R165.2 | length 3.3
  Top Layer w0.254: P7.8@50.54,94.38 51.146,94.986 R165.2@52.578,94.986 C55.1@53.594,94.986
P7S4_LVCMOS12: C55.2 R163.1 R166.2 U1.D16 | length 35.6
  Top Layer w0.254: C55.2@53.594,93.686 R166.2@54.61,93.686 R163.1@55.626,93.686 56.541,93.686 58.268,91.959 58.268,81.432 62.179,77.521 70.764,77.521 72.918,75.367 U1.D16@72.918,72.821
P7S5_ECL: C57.1 P7.10 R171.2 | length 3.2
  Top Layer w0.254: P7.10@50.54,91.84 50.841,92.141 R171.2@52.578,92.141 C57.1@53.594,92.141
P7S5_LVCMOS12: C57.2 R169.1 R172.2 U1.B12 | length 32.2
  Top Layer w0.254: C57.2@53.594,90.841 R172.2@54.61,90.841 R169.1@55.626,90.841 v1(56.312,90.841) ; v1(70.409,69.317) 70.422,69.317 U1.B12@70.918,68.821
  Signal Layer 1 w0.254: v1(56.312,90.841) 60.02,87.132 60.02,77.241 67.945,69.317 v1(70.409,69.317)
P7S6_ECL: C59.1 P7.12 R177.2 | length 3.1
  Top Layer w0.254: P7.12@50.54,89.3 53.59,89.3 C59.1@53.594,89.296
P7S6_LVCMOS12: C59.2 R175.1 R178.2 U1.B10 | length 31.1
  Top Layer w0.254: C59.2@53.594,87.996 R178.2@54.61,87.996 R175.1@55.626,87.996 v1(56.312,87.996) ; v1(70.409,67.31) 70.898,66.821 U1.B10@70.918,66.821
  Signal Layer 1 w0.254: v1(56.312,87.996) 58.75,85.558 58.75,76.937 68.377,67.31 v1(70.409,67.31)
P7S7_ECL: C61.1 P7.14 R183.2 | length 3.2
  Top Layer w0.254: P7.14@50.54,86.76 50.849,86.451 R183.2@52.578,86.451 C61.1@53.594,86.451
P7S7_LVCMOS12: C61.2 R181.1 R184.2 U1.B8 | length 30.1
  Top Layer w0.254: C61.2@53.594,85.151 R184.2@54.61,85.151 R181.1@55.626,85.151 v1(56.312,85.151) ; v1(70.409,65.329) U1.B8@70.918,64.821
  Signal Layer 1 w0.254: v1(56.312,85.151) 57.556,83.907 57.556,76.556 68.783,65.329 v1(70.409,65.329)
P7S8_ECL: C63.1 P7.16 R189.2 | length 3.3
  Top Layer w0.254: P7.16@50.54,84.22 51.154,83.606 R189.2@52.578,83.606 C63.1@53.594,83.606
P7S8_LVCMOS12: C63.2 R187.1 R190.2 U1.B6 | length 29.2
  Top Layer w0.254: C63.2@53.594,82.306 R190.2@54.61,82.306 R187.1@55.626,82.306 v1(56.312,82.306) ; v1(70.409,63.322) 70.416,63.322 U1.B6@70.918,62.821
  Signal Layer 1 w0.254: v1(56.312,82.306) 56.312,75.819 68.809,63.322 v1(70.409,63.322)
P8S1_ECL: C50.1 P8.2 R149.2 | length 3.8
  Top Layer w0.254: P8.2@66.54,102 68.009,103.469 R149.2@68.682,103.469 C50.1@69.723,103.469
P8S1_LVCMOS12: C50.2 R146.1 R150.2 U1.L16 | length 35.3
  Top Layer w0.254: C50.2@69.723,102.169 R150.2@70.764,102.169 R146.1@71.806,102.169 72.71,102.169 78.613,96.266 78.613,82.55 79.918,81.245 U1.L16@79.918,72.821
P8S2_ECL: C52.1 P8.4 R155.2 | length 3.7
  Top Layer w0.254: P8.4@66.54,99.46 67.744,100.664 R155.2@68.682,100.664 C52.1@69.723,100.664
P8S2_LVCMOS12: C52.2 R152.1 R156.2 U1.K16 | length 32.2
  Top Layer w0.254: C52.2@69.723,99.364 R156.2@70.764,99.364 R152.1@71.806,99.364 72.822,99.364 77.089,95.098 77.089,82.042 78.918,80.213 U1.K16@78.918,72.821
P8S3_ECL: C54.1 P8.6 R161.2 | length 3.6
  Top Layer w0.254: P8.6@66.54,96.92 67.479,97.859 R161.2@68.682,97.859 C54.1@69.723,97.859
P8S3_LVCMOS12: C54.2 R158.1 R162.2 U1.J16 | length 28.9
  Top Layer w0.254: C54.2@69.723,96.559 R162.2@70.764,96.559 R158.1@71.806,96.559 72.681,96.559 75.59,93.65 75.59,82.017 77.918,79.689 U1.J16@77.918,72.821
P8S4_ECL: C56.1 P8.8 R167.2 | length 3.5
  Top Layer w0.254: P8.8@66.54,94.38 67.215,95.055 R167.2@68.682,95.055 C56.1@69.723,95.055
P8S4_LVCMOS12: C56.2 R164.1 R168.2 U1.H16 | length 25.7
  Top Layer w0.254: C56.2@69.723,93.755 R168.2@70.764,93.755 R164.1@71.806,93.755 72.692,93.755 74.371,92.075 74.371,81.331 76.918,78.784 U1.H16@76.918,72.821
P8S5_ECL: C58.1 P8.10 R173.2 | length 3.4
  Top Layer w0.254: P8.10@66.54,91.84 66.95,92.25 R173.2@68.682,92.25 C58.1@69.723,92.25
P8S5_LVCMOS12: C58.2 R170.1 R174.2 U1.E15 | length 24.8
  Top Layer w0.254: C58.2@69.723,90.95 R174.2@70.764,90.95 R170.1@71.806,90.95 72.561,90.95 v1(72.568,90.957) ; U1.E15@73.918,71.821 73.929,71.821 v1(74.422,72.314)
  Signal Layer 1 w0.254: v1(72.568,90.957) 76.606,86.918 76.606,75.921 74.422,73.736 v1(74.422,72.314)
P8S6_ECL: C60.1 P8.12 R179.2 | length 3.2
  Top Layer w0.254: P8.12@66.54,89.3 66.685,89.445 R179.2@68.682,89.445 C60.1@69.723,89.445
P8S6_LVCMOS12: C60.2 R176.1 R180.2 U1.C15 | length 22
  Top Layer w0.254: C60.2@69.723,88.145 R180.2@70.764,88.145 R176.1@71.806,88.145 v1(72.568,88.145) ; U1.C15@71.918,71.821 72.411,72.314 v1(72.415,72.314)
  Signal Layer 1 w0.254: v1(72.415,72.314) 72.415,73.381 75.641,76.606 75.641,85.071 v1(72.568,88.145)
P8S7_ECL: C62.1 P8.14 R185.2 | length 3.2
  Top Layer w0.254: P8.14@66.54,86.76 66.66,86.64 R185.2@68.682,86.64 C62.1@69.723,86.64
P8S7_LVCMOS12: C62.2 R182.1 R186.2 U1.B15 | length 18.2
  Top Layer w0.254: C62.2@69.723,85.34 R186.2@70.764,85.34 R182.1@71.806,85.34 v1(72.542,85.34) ; U1.B15@70.918,71.821 71.411,72.314 v1(71.425,72.314)
  Signal Layer 1 w0.254: v1(71.425,72.314) 71.425,74.117 73.99,76.683 73.99,83.892 v1(72.542,85.34)
P8S8_ECL: C64.1 P8.16 R191.2 | length 3.3
  Top Layer w0.254: P8.16@66.54,84.22 66.925,83.835 R191.2@68.682,83.835 C64.1@69.723,83.835
P8S8_LVCMOS12: C64.2 R188.1 R192.2 U1.B14 | length 15.6
  Top Layer w0.254: C64.2@69.723,82.535 R192.2@70.764,82.535 R188.1@71.806,82.535 v1(72.517,82.535) ; v1(70.409,71.323) 70.415,71.323 U1.B14@70.918,70.821
  Signal Layer 1 w0.254: v1(70.409,71.323) 70.409,77.241 72.517,79.35 v1(72.517,82.535)
P9S1_ECL: C65.1 P9.2 R195.2 | length 3.5
  Top Layer w0.254: P9.2@82.906,102 84.273,103.368 R195.2@84.811,103.368 C65.1@85.852,103.368
P9S1_LVCMOS12: C65.2 R193.1 R196.2 U1.R16 | length 40.3
  Top Layer w0.254: U1.R16@83.918,72.821 83.918,73.838 85.416,75.336 88.29,75.336 93.599,80.645 93.599,97.942 89.474,102.068 R193.1@87.935,102.068 R196.2@86.893,102.068 C65.2@85.852,102.068
P9S2_ECL: C67.1 P9.4 R201.2 | length 3.4
  Top Layer w0.254: P9.4@82.906,99.46 84.03,100.584 R201.2@84.811,100.584 C67.1@85.852,100.584
P9S2_LVCMOS12: C67.2 R199.1 R202.2 U1.P16 | length 36.9
  Top Layer w0.254: U1.P16@82.918,72.821 82.918,74.231 84.912,76.225 87.681,76.225 92.583,81.128 92.583,96.037 89.336,99.284 R199.1@87.935,99.284 R202.2@86.893,99.284 C67.2@85.852,99.284
P9S3_ECL: C69.1 P9.6 R207.2 | length 3.3
  Top Layer w0.254: P9.6@82.906,96.92 83.787,97.801 R207.2@84.811,97.801 C69.1@85.852,97.801
P9S3_LVCMOS12: C69.2 R205.1 R208.2 U1.N16 | length 33.3
  Top Layer w0.254: U1.N16@81.918,72.821 81.918,74.603 84.506,77.191 87.122,77.191 91.389,81.458 91.389,94.234 89.122,96.501 R205.1@87.935,96.501 R208.2@86.893,96.501 C69.2@85.852,96.501
P9S4_ECL: C71.1 P9.8 R213.2 | length 3.2
  Top Layer w0.254: P9.8@82.906,94.38 83.544,95.018 R213.2@84.811,95.018 C71.1@85.852,95.018
P9S4_LVCMOS12: C71.2 R211.1 R214.2 U1.M16 | length 30.1
  Top Layer w0.254: U1.M16@80.918,72.821 80.918,75.05 84.099,78.232 86.741,78.232 90.373,81.864 90.373,92.329 88.984,93.718 R211.1@87.935,93.718 R214.2@86.893,93.718 C71.2@85.852,93.718
P9S5_ECL: C73.1 P9.10 R219.2 | length 3.1
  Top Layer w0.254: P9.10@82.906,91.84 83.301,92.235 R219.2@84.811,92.235 C73.1@85.852,92.235
P9S5_LVCMOS12: C73.2 R217.1 R220.2 U1.M15 | length 30.8
  Top Layer w0.254: U1.M15@80.918,71.821 81.407,72.31 v1(81.407,72.314) ; C73.2@85.852,90.935 R220.2@86.893,90.935 R217.1@87.935,90.935 v1(88.646,90.935)
  Signal Layer 1 w0.254: v1(81.407,72.314) 81.407,74.092 84.506,77.191 88.646,77.191 92.583,81.128 92.583,86.998 v1(88.646,90.935)
P9S6_ECL: C75.1 P9.12 R225.2 | length 3
  Top Layer w0.254: P9.12@82.906,89.3 83.058,89.452 R225.2@84.811,89.452 C75.1@85.852,89.452
P9S6_LVCMOS12: C75.2 R223.1 R226.2 U1.K15 | length 27.8
  Top Layer w0.254: U1.K15@78.918,71.821 78.927,71.821 v1(79.42,72.314) ; C75.2@85.852,88.152 R226.2@86.893,88.152 R223.1@87.935,88.152 v1(88.646,88.152)
  Signal Layer 1 w0.254: v1(79.42,72.314) 79.42,73.553 84.099,78.232 88.163,78.232 91.389,81.458 91.389,85.409 v1(88.646,88.152)
P9S7_ECL: C77.1 P9.14 R231.2 | length 3
  Top Layer w0.254: P9.14@82.906,86.76 82.997,86.669 R231.2@84.811,86.669 C77.1@85.852,86.669
P9S7_LVCMOS12: C77.2 R229.1 R232.2 U1.H15 | length 25.2
  Top Layer w0.254: U1.H15@76.918,71.821 76.918,71.863 v1(77.394,72.339) ; C77.2@85.852,85.369 R232.2@86.893,85.369 R229.1@87.935,85.369 v1(88.697,85.369)
  Signal Layer 1 w0.254: v1(77.394,72.339) 77.394,73.177 83.617,79.4 87.909,79.4 90.373,81.864 90.373,83.693 v1(88.697,85.369)
P9S8_ECL: C79.1 P9.16 R237.2 | length 3.1
  Top Layer w0.254: P9.16@82.906,84.22 83.24,83.886 R237.2@84.811,83.886 C79.1@85.852,83.886
P9S8_LVCMOS12: C79.2 R235.1 R238.2 U1.F15 | length 21.4
  Top Layer w0.254: U1.F15@74.918,71.821 75.411,72.314 v1(75.413,72.314) ; C79.2@85.852,82.586 R238.2@86.893,82.586 R235.1@87.935,82.586 v1(88.671,82.586)
  Signal Layer 1 w0.254: v1(75.413,72.314) 75.413,73 83.058,80.645 86.731,80.645 v1(88.671,82.586)
P10S1_ECL: C66.1 P10.2 R197.2 | length 3.6
  Top Layer w0.254: P10.2@98.54,102 99.908,103.368 R197.2@100.559,103.368 C66.1@101.575,103.368
P10S1_LVCMOS12: C66.2 R194.1 R198.2 U1.T12 | length 55.2
  Top Layer w0.254: U1.T12@84.918,68.821 98.285,68.821 108.128,78.664 108.128,98.527 104.587,102.068 R194.1@103.607,102.068 R198.2@102.591,102.068 C66.2@101.575,102.068
P10S2_ECL: C68.1 P10.4 R203.2 | length 3.5
  Top Layer w0.254: P10.4@98.54,99.46 99.621,100.541 R203.2@100.559,100.541 C68.1@101.575,100.541
P10S2_LVCMOS12: C68.2 R200.1 R204.2 U1.T13 | length 49.9
  Top Layer w0.254: U1.T13@84.918,69.821 97.405,69.821 107.112,79.527 107.112,96.647 104.518,99.241 R200.1@103.607,99.241 R204.2@102.591,99.241 C68.2@101.575,99.241
P10S3_ECL: C70.1 P10.6 R209.2 | length 3.4
  Top Layer w0.254: P10.6@98.54,96.92 99.334,97.714 R209.2@100.559,97.714 C70.1@101.575,97.714
P10S3_LVCMOS12: C70.2 R206.1 R210.2 U1.T14 | length 44.9
  Top Layer w0.254: U1.T14@84.918,70.821 96.647,70.821 106.147,80.32 106.147,94.844 104.576,96.414 R206.1@103.607,96.414 R210.2@102.591,96.414 C70.2@101.575,96.414
P10S4_ECL: C72.1 P10.8 R215.2 | length 3.2
  Top Layer w0.254: P10.8@98.54,94.38 99.048,94.888 R215.2@100.559,94.888 C72.1@101.575,94.888
P10S4_LVCMOS12: C72.2 R212.1 R216.2 U1.T15 | length 39.8
  Top Layer w0.254: U1.T15@84.918,71.821 96.052,71.821 105.181,80.95 105.181,92.786 104.38,93.588 R212.1@103.607,93.588 R216.2@102.591,93.588 C72.2@101.575,93.588
P10S5_ECL: C74.1 P10.10 R221.2 | length 3.1
  Top Layer w0.254: P10.10@98.54,91.84 98.761,92.061 R221.2@100.559,92.061 C74.1@101.575,92.061
P10S5_LVCMOS12: C74.2 R218.1 R222.2 U1.R12 | length 44
  Top Layer w0.254: U1.R12@83.918,68.821 84.404,69.307 v1(84.404,69.317) ; C74.2@101.575,90.761 R222.2@102.591,90.761 R218.1@103.607,90.761 v1(104.318,90.761)
  Signal Layer 1 w0.254: v1(84.404,69.317) 97.968,69.317 107.874,79.223 107.874,87.205 v1(104.318,90.761)
P10S6_ECL: C76.1 P10.12 R227.2 | length 3.1
  Top Layer w0.254: P10.12@98.54,89.3 98.606,89.234 R227.2@100.559,89.234 C76.1@101.575,89.234
P10S6_LVCMOS12: C76.2 R224.1 R228.2 U1.R14 | length 38.5
  Top Layer w0.254: U1.R14@83.918,70.821 84.404,71.307 v1(84.404,71.323) ; C76.2@101.575,87.934 R228.2@102.591,87.934 R224.1@103.607,87.934 v1(104.318,87.935)
  Signal Layer 1 w0.254: v1(84.404,71.323) 98.4,71.323 106.731,79.654 106.731,85.522 v1(104.318,87.935)
P10S7_ECL: C78.1 P10.14 R233.2 | length 3.2
  Top Layer w0.254: P10.14@98.54,86.76 98.892,86.408 R233.2@100.559,86.408 C78.1@101.575,86.408
P10S7_LVCMOS12: C78.2 R230.1 R234.2 U1.R15 | length 33.3
  Top Layer w0.254: U1.R15@83.918,71.821 83.923,71.821 v1(84.416,72.314) ; C78.2@101.575,85.108 R234.2@102.591,85.108 R230.1@103.607,85.108 v1(104.318,85.108)
  Signal Layer 1 w0.254: v1(84.416,72.314) 84.416,74.333 85.039,74.955 98.552,74.955 105.435,81.839 105.435,83.99 v1(104.318,85.108)
P10S8_ECL: C80.1 P10.16 R239.2 | length 3.3
  Top Layer w0.254: P10.16@98.54,84.22 99.179,83.581 R239.2@100.559,83.581 C80.1@101.575,83.581
P10S8_LVCMOS12: C80.2 R236.1 R240.2 U1.P15 | length 29.9
  Top Layer w0.254: U1.P15@82.918,71.821 82.921,71.821 v1(83.414,72.314) ; C80.2@101.575,82.281 R240.2@102.591,82.281 R236.1@103.607,82.281 v1(104.318,82.281)
  Signal Layer 1 w0.254: v1(83.414,72.314) 83.414,74.727 84.887,76.2 98.237,76.2 v1(104.318,82.281)
RESETIN_LVCMOS33: P11.19 U1.T7 | length 37.8
  Top Layer w0.254: U1.T7@84.918,63.821 108.061,63.821 114.742,57.14 P11.19@120,57.14
TCK_LVCMOS33: P11.17 U1.C14 | length 56.8
  Top Layer w0.254: U1.C14@71.918,70.821 72.415,71.318 v1(72.415,71.323)
  Signal Layer 2 w0.254: v1(72.415,71.323) 72.923,71.831 72.923,72.974 74.905,74.955 96.215,74.955 111.491,59.68 P11.17@120,59.68
TDI_LVCMOS33: P11.15 U1.C12 | length 60.1
  Top Layer w0.254: v1(71.411,69.317) 71.422,69.317 U1.C12@71.918,68.821
  Signal Layer 2 w0.254: v1(71.411,69.317) 71.907,69.813 71.907,73.609 74.473,76.175 97.511,76.175 111.465,62.22 P11.15@120,62.22
TDO_LVCMOS33: P11.26 U1.E14 | length 59.5
  Top Layer w0.254: U1.E14@73.918,70.821 74.397,71.3 v1(74.397,71.323)
  Signal Layer 1 w0.254: v1(74.397,71.323) 76.803,71.323 83.763,64.364 98.425,64.364 115.214,47.574 120.594,47.574 P11.26@122.54,49.52
TEST1_LVCMOS12: P12.2 U1.C11 | length 41.6
  Top Layer w0.254: v1(71.411,68.326) 71.413,68.326 U1.C11@71.918,67.821
  Signal Layer 2 w0.254: P12.2@34.265,77.419 41.326,77.419 49.911,68.834 70.903,68.834 v1(71.411,68.326)
TEST2_LVCMOS12: P12.4 U1.C10 | length 41
  Top Layer w0.254: v1(71.411,67.31) 71.9,66.821 U1.C10@71.918,66.821
  Signal Layer 2 w0.254: P12.4@34.265,74.879 41.478,74.879 48.539,67.818 70.903,67.818 v1(71.411,67.31)
TEST3_LVCMOS12: P12.6 U1.C9 | length 40.4
  Top Layer w0.254: v1(71.413,66.318) 71.91,65.821 U1.C9@71.918,65.821
  Signal Layer 2 w0.254: P12.6@34.265,72.339 41.656,72.339 47.168,66.827 70.904,66.827 v1(71.413,66.318)
TEST4_LVCMOS12: P12.8 U1.C8 | length 39.7
  Top Layer w0.254: v1(71.413,65.303) 71.435,65.303 U1.C8@71.918,64.821
  Signal Layer 2 w0.254: P12.8@34.265,69.799 41.986,69.799 45.974,65.811 70.905,65.811 v1(71.413,65.303)
TEST5_LVCMOS12: P12.10 U1.C7 | length 39.1
  Top Layer w0.254: v1(71.413,64.314) 71.425,64.314 U1.C7@71.918,63.821
  Signal Layer 2 w0.254: P12.10@34.265,67.259 42.443,67.259 44.882,64.821 70.906,64.821 v1(71.413,64.314)
TEST6_LVCMOS12: P12.12 U1.C6 | length 38.4
  Top Layer w0.254: v1(71.413,63.322) 71.416,63.322 U1.C6@71.918,62.821
  Signal Layer 2 w0.254: P12.12@34.265,64.719 43.028,64.719 43.917,63.83 70.905,63.83 v1(71.413,63.322)
TEST7_LVCMOS12: P12.14 U1.C5 | length 38.3
  Top Layer w0.254: v1(71.411,62.306) 71.896,61.821 U1.C5@71.918,61.821
  Signal Layer 2 w0.254: P12.14@34.265,62.179 40.919,62.179 41.554,62.814 70.903,62.814 v1(71.411,62.306)
TEST8_LVCMOS12: P12.16 U1.C4 | length 39
  Top Layer w0.254: v1(71.413,61.316) 71.423,61.316 U1.C4@71.918,60.821
  Signal Layer 2 w0.254: P12.16@34.265,59.639 40.64,59.639 42.824,61.824 70.905,61.824 v1(71.413,61.316)
TEST9_LVCMOS12: P12.18 U1.E4 | length 41.6
  Top Layer w0.254: v1(73.42,60.325) v1(73.42,60.325) U1.E4@73.918,60.821
  Signal Layer 2 w0.254: P12.18@34.265,57.099 40.386,57.099 44.094,60.808 70.942,60.808 71.425,60.325 v1(73.42,60.325)
TEST10_LVCMOS12: P12.20 U1.B2 | length 38.4
  Top Layer w0.254: v1(70.409,58.318) 70.415,58.318 U1.B2@70.918,58.821
  Signal Layer 2 w0.254: P12.20@34.265,54.559 40.132,54.559 43.891,58.318 v1(70.409,58.318)
TMS_LVCMOS33: P11.16 U1.A15 | length 63.5
  Top Layer w0.254: v1(69.291,71.831) 69.302,71.821 U1.A15@69.918,71.821
  Signal Layer 2 w0.254: v1(69.291,71.831) 69.952,71.831 70.917,72.796 70.917,74.32 74.168,77.572 98.679,77.572 112.776,63.475 121.285,63.475 P11.16@122.54,62.22
pads on no net: U1.C13 U1.D5 U1.D6 U1.D8 U1.D9 U1.D11 U1.D12 U1.D14 U1.E6 U1.E7 U1.E8 U1.E10 U1.E11 U1.E12 U1.E13 U1.F4 U1.F5 U1.F6 U1.F7 U1.F9 U1.F10 U1.F12 U1.F13 U1.F14 U1.G5 U1.G6 U1.G11 U1.G12 U1.G14 U1.H4 U1.H5 U1.H11 U1.H13 U1.H14 U1.J4 U1.J6 U1.J11 U1.J12 U1.J13 U1.J14 U1.K5 U1.K6 U1.K11 U1.K12 U1.K14 U1.L4 U1.L5 U1.L7 U1.L8 U1.L10 U1.L11 U1.L12 U1.L13 U1.L14 U1.M3 U1.M4 U1.M5 U1.M6 U1.M7 U1.M9 U1.M10 U1.M11 U1.M12 U1.M13 U1.M14 U1.N3 U1.N4 U1.N5 U1.N6 U1.N8 U1.N9 U1.N11 U1.N12 U1.N14 U1.P4 U1.P5 U1.P6 U1.P7 U1.P8 U1.P9 U1.P10 U1.P11 U1.P12 U1.P13 U1.P14 U1.R3 U1.R5 U1.R7 U1.R9 U1.R11 U1.T2 U1.T3 U1.T8 U1.T9 U1.T10 U1.T11

## Polygon pours and split planes (outlines as drawn)
GND on Internal Plane 1 (split plane): 124.871,25.129 20.129,25.129 20.129,104.871 124.871,104.871
+1.2V on Internal Plane 2 (split plane): 108.39,70.951 108.449,70.903 108.515,70.868 108.587,70.846 108.661,70.839 124.871,70.839 124.871,41.201 120.123,41.201 107.764,53.56 107.705,53.608 107.639,53.643 107.567,53.665 107.493,53.672 71.126,53.672 66.601,58.198 66.601,74.009 71.228,78.637 100.705,78.637
+1V on Internal Plane 2 (split plane): 124.871,71.604 108.82,71.604 101.134,79.29 101.076,79.338 101.01,79.373 100.938,79.395 100.863,79.402 71.069,79.402 70.995,79.395 70.923,79.373 70.857,79.338 70.798,79.29 65.947,74.439 65.899,74.381 65.864,74.315 65.842,74.243 65.835,74.168 65.835,58.039 65.842,57.964 65.864,57.892 65.899,57.826 65.947,57.768 70.697,53.018 70.755,52.971 70.821,52.935 70.893,52.914 70.968,52.906 107.334,52.906 119.693,40.547 119.752,40.499 119.818,40.464 119.89,40.442 119.964,40.435 124.871,40.435 124.871,25.129 20.129,25.129 20.129,104.871 124.871,104.871
+3.3V on Internal Plane 3 (split plane): 124.871,25.129 20.129,25.129 20.129,104.871 124.871,104.871
-5.2V on Internal Plane 4 (split plane): 124.871,25.129 20.129,25.129 20.129,104.871 124.871,104.871

## Other copper
Internal Plane 2 (plane layer: these items are gaps in the copper):
  lines w0.762: 124.968,71.222 108.661,71.222 100.863,79.019 71.069,79.019 66.218,74.168 66.218,58.039 70.968,53.289 107.493,53.289 119.964,40.818 125.451,40.818 125.476,40.792

## Silkscreen, mask and mechanical layers (free items; w line width, h text height)
Top Overlay:
  lines w0.762: 20,25 125,25 125,105 20,105 20,25
  text "JUNO RPC FRONT v2" at 37.719,75.336 h0.76
  text "jxs 20250311" at 37.821,73.762 h0.76

## Text inside footprints (layer, text, board x,y; h text height)
P1: Top Overlay "2" at 34.032,48.54 h0.76 r270; Top Overlay "1" at 31.492,48.54 h0.76 r270; Top Overlay "15" at 31.492,26.696 h0.76 r270; Top Overlay "16" at 34.032,26.696 h0.76 r270
P2: Top Overlay "2" at 50.032,48.54 h0.76 r270; Top Overlay "1" at 47.492,48.54 h0.76 r270; Top Overlay "15" at 47.492,26.696 h0.76 r270; Top Overlay "16" at 50.032,26.696 h0.76 r270
P3: Top Overlay "2" at 66.032,48.54 h0.76 r270; Top Overlay "1" at 63.492,48.54 h0.76 r270; Top Overlay "15" at 63.492,26.696 h0.76 r270; Top Overlay "16" at 66.032,26.696 h0.76 r270
P4: Top Overlay "2" at 82.032,48.54 h0.76 r270; Top Overlay "1" at 79.492,48.54 h0.76 r270; Top Overlay "15" at 79.492,26.696 h0.76 r270; Top Overlay "16" at 82.032,26.696 h0.76 r270
P5: Top Overlay "2" at 98.032,48.54 h0.76 r270; Top Overlay "1" at 95.492,48.54 h0.76 r270; Top Overlay "15" at 95.492,26.696 h0.76 r270; Top Overlay "16" at 98.032,26.696 h0.76 r270
P6: Top Overlay "16" at 34.032,82.696 h0.76 r270; Top Overlay "15" at 31.492,82.696 h0.76 r270; Top Overlay "1" at 31.572,104.038 h0.76 r270; Top Overlay "2" at 34.138,104.14 h0.76 r270
P7: Top Overlay "16" at 50.032,82.696 h0.76 r270; Top Overlay "15" at 47.492,82.696 h0.76 r270; Top Overlay "1" at 47.492,104.54 h0.76 r270; Top Overlay "2" at 50.032,104.54 h0.76 r270
P8: Top Overlay "16" at 66.032,82.696 h0.76 r270; Top Overlay "15" at 63.492,82.696 h0.76 r270; Top Overlay "1" at 63.492,104.54 h0.76 r270; Top Overlay "2" at 66.032,104.54 h0.76 r270
P9: Top Overlay "16" at 82.398,82.696 h0.76 r270; Top Overlay "15" at 79.858,82.696 h0.76 r270; Top Overlay "1" at 79.858,104.54 h0.76 r270; Top Overlay "2" at 82.398,104.54 h0.76 r270
P10: Top Overlay "16" at 98.032,82.696 h0.76 r270; Top Overlay "15" at 95.492,82.696 h0.76 r270; Top Overlay "1" at 95.492,104.54 h0.76 r270; Top Overlay "2" at 98.032,104.54 h0.76 r270
P11: Top Overlay "2" at 122.032,82.54 h0.76 r270; Top Overlay "1" at 119.492,82.54 h0.76 r270; Top Overlay "25" at 119.492,47.996 h0.76 r270; Top Overlay "26" at 122.032,47.996 h0.76 r270
P12: Top Overlay "2" at 33.757,79.959 h0.76 r270; Top Overlay "1" at 31.217,79.959 h0.76 r270; Top Overlay "19" at 31.217,53.035 h0.76 r270; Top Overlay "20" at 33.757,53.035 h0.76 r270